# EAGLE board Final Project (EAGLE 9.7.0)

Size 189.75 x 194.45 mm. Coordinates in mm from the lower left corner, seen from the top.
Outline: 0,0 189.75,0 189.75,194.45 0,194.45 0,0
Copper layers (1*16): Top 0.035mm / dielectric 1.5mm / Bottom 0.035mm
Design rules "default": minimum track width 6mil, minimum drill 0.35mm, track to track 6mil, track to pad 6mil, pad to pad 6mil, via to via 6mil, smd to smd 6mil, copper to edge 40mil, drill to drill 6mil, minimum pad ring 10mil, minimum via ring 8mil, stop-mask expansion 4mil, vias tented up to drill 0mil, thermal gap 10mil

## Footprints (pad centres in the part's own frame; a part is rotated, then mirrored left to right if it is on the bottom)
DIODE-AXIAL = drill 1: 1 -5.08,0; 2 5.08,0
LEDRD254W60D565H860B = drill 0.981 pad 1.581: 1 -1.27,0; 2 1.27,0
LEDRD254W60D565H860B_B = drill 0.981 pad 1.581: 1 -1.27,0; 2 1.27,0
LEDRD254W60D565H860B_G = drill 0.981 pad 1.581: 1 -1.27,0; 2 1.27,0
MOTOR = drill 1.118 pad 3.15 octagon: + 2.54,0; - -2.54,0
RESAD1016W63L850D250B = drill 0.83 pad 1.43: 1 -5.08,0; 2 5.08,0
GL5528 = drill 0.8 pad 1.4: 1 -1.702,0; 2 1.702,0
HA-06-SM065 = drill 1 pad 1.676: 1 -2.54,-2.54; 2 0,2.54; 3 2.54,-2.54
SEN-13322 = drill 1.016 long: 1 -2.54,0; 2 0,0; 3 2.54,0
TO92 = drill 0.813 octagon: 1 -1.27,0; 2 0,1.905; 3 1.27,0
ARDUINO-UNO-R3-SHIELD = drill 1.016 pad 1.88: 3.3V 24.13,-2.54; 5V 24.13,0; A0 24.13,12.7; A1 24.13,15.24; A2 24.13,17.78; A3 24.13,20.32; A4 24.13,22.86; A5 24.13,25.4; AREF -24.13,-13.97; D2 -24.13,20.32; D3 -24.13,17.78; D4 -24.13,15.24; D5 -24.13,12.7; D6 -24.13,10.16; D7 -24.13,7.62; D8 -24.13,3.81; D9 -24.13,1.27; D10 -24.13,-1.27; D11 -24.13,-3.81; D12 -24.13,-6.35; D13 -24.13,-8.89; GND@0 24.13,2.54; GND@1 24.13,5.08; GND@2 -24.13,-11.43; IOREF 24.13,-7.62; NC 24.13,-10.16; RES 24.13,-5.08; RX -24.13,25.4; SCL -24.13,-19.05; SDA -24.13,-16.51; TX -24.13,22.86; VIN 24.13,7.62
JHD-162A = drill 1.016 long: 1 -19.05,0; 2 -16.51,0; 3 -13.97,0; 4 -11.43,0; 5 -8.89,0; 6 -6.35,0; 7 -3.81,0; 8 -1.27,0; 9 1.27,0; 10 3.81,0; 11 6.35,0; 12 8.89,0; 13 11.43,0; 14 13.97,0; 15 16.51,0; 16 19.05,0

## Placement (x,y rotation side)
D1  DIODEDIODE-AXIAL  [DIODE-AXIAL]  123.91,107.63 180 top
D2  RED  [LEDRD254W60D565H860B]  46.82,23.64 180 top
D3  BLUE  [LEDRD254W60D565H860B_B]  42.42,8.93 180 top
D5  GREEN  [LEDRD254W60D565H860B_G]  158.53,16.93 180 top
M1  MOTOR_HDR  [MOTOR]  181.49,99.45 270 top
R1  1k  [RESAD1016W63L850D250B]  104.76,52.96 0 top
R2  1k  [RESAD1016W63L850D250B]  131.53,82.23 0 top
R3  PHOTOCELL_GL5528  [GL5528]  92.16,110.17 0 top
R4  220  [RESAD1016W63L850D250B]  53.17,23.64 0 top
R5  10k  [RESAD1016W63L850D250B]  85.81,107.63 0 top
R6  220  [RESAD1016W63L850D250B]  48.77,8.93 0 top
R7  1k  [RESAD1016W63L850D250B]  164.88,16.93 0 top
RPOT1  10k  [HA-06-SM065]  80.73,84.77 0 top
SEN1  SEN-13322  [SEN-13322]  6.99,117.23 0 top
T1  NPN  [TO92]  136.61,87.31 180 top
U1  ARDUINO-UNO-R3-SHIELD  [ARDUINO-UNO-R3-SHIELD]  117.76,164.6 270 top
U3  LCD-16X2JHD-162A  [JHD-162A]  92.14,36.63 0 top

## Library data of the parts
D1 M1 R1-R7 RPOT1 SEN1 U1 U3 = Tinkercad
D2 = Tinkercad; CATEGORY: Opto-Electronic; SUB-CATEGORY: LED; VALUE: LED_RED
D3 = Tinkercad; CATEGORY: Opto-Electronic; SUB-CATEGORY: LED; VALUE: LED_BLUE
D5 = Tinkercad; CATEGORY: Opto-Electronic; SUB-CATEGORY: LED; VALUE: LED_GREEN
T1 = Tinkercad; CATEGORY: Transistor; SUB-CATEGORY: BJT; TYPE: NPN

## Nets
D2_A: D2.1 R4.1
D3_A: D3.1 R6.1
D5_A: D5.1 R7.1
M1_-: D1.1 M1.- T1.3
T1_B: R2.2 T1.2
U1_5V: D1.2 M1.+ R3.2 RPOT1.3 SEN1.1 U1.5V U3.2 U3.15
U1_A0: SEN1.3 U1.A0
U1_A1: R3.1 R5.2 U1.A1
U1_D2: U1.D2 U3.6
U1_D4: U1.D4 U3.11
U1_D5: U1.D5 U3.12
U1_D6: U1.D6 U3.13
U1_D7: U1.D7 U3.14
U1_D10: R7.2 U1.D10
U1_D11: R6.2 U1.D11
U1_D12: R4.2 U1.D12
U1_D13: R2.1 U1.D13
U1_GND: D2.2 D3.2 D5.2 R1.1 R5.1 RPOT1.1 SEN1.2 T1.1 U1.GND@0 U1.GND@1 U1.GND@2 U3.1 U3.5
U1_TX: U1.TX U3.4
U3_LED-: R1.2 U3.16
U3_VO: RPOT1.2 U3.3

## Tracks (layer width: path | path; a pad name or v marks a point on that pad's centre or on a via)
D2_A  (1 unrouted)
D3_A  (1 unrouted)
D5_A  (1 unrouted)
M1_-  (2 unrouted)
T1_B  (1 unrouted)
U1_5V  (7 unrouted)
U1_A0  (1 unrouted)
U1_A1  (2 unrouted)
U1_D2  (1 unrouted)
U1_D4  (1 unrouted)
U1_D5  (1 unrouted)
U1_D6  (1 unrouted)
U1_D7  (1 unrouted)
U1_D10  (1 unrouted)
U1_D11  (1 unrouted)
U1_D12  (1 unrouted)
U1_D13  (1 unrouted)
U1_GND  (12 unrouted)
U1_TX  (1 unrouted)
U3_LED-  (1 unrouted)
U3_VO  (1 unrouted)